# Altium PCB DIOT_Sampler 20spacin.PCBDOC (part 2 of 8)
Units mm, origin at the board's own origin, x right, y up, seen from the top; angles counter-clockwise.
Board outline 222.37 x 100 mm, 4 copper layers (Top, GP1(GND), L3, Bot), stack 1.648 mm thick; 680 components, 424 nets, 2212 pads, 808 vias.
Unrouted connection lines stored in the file: 327.
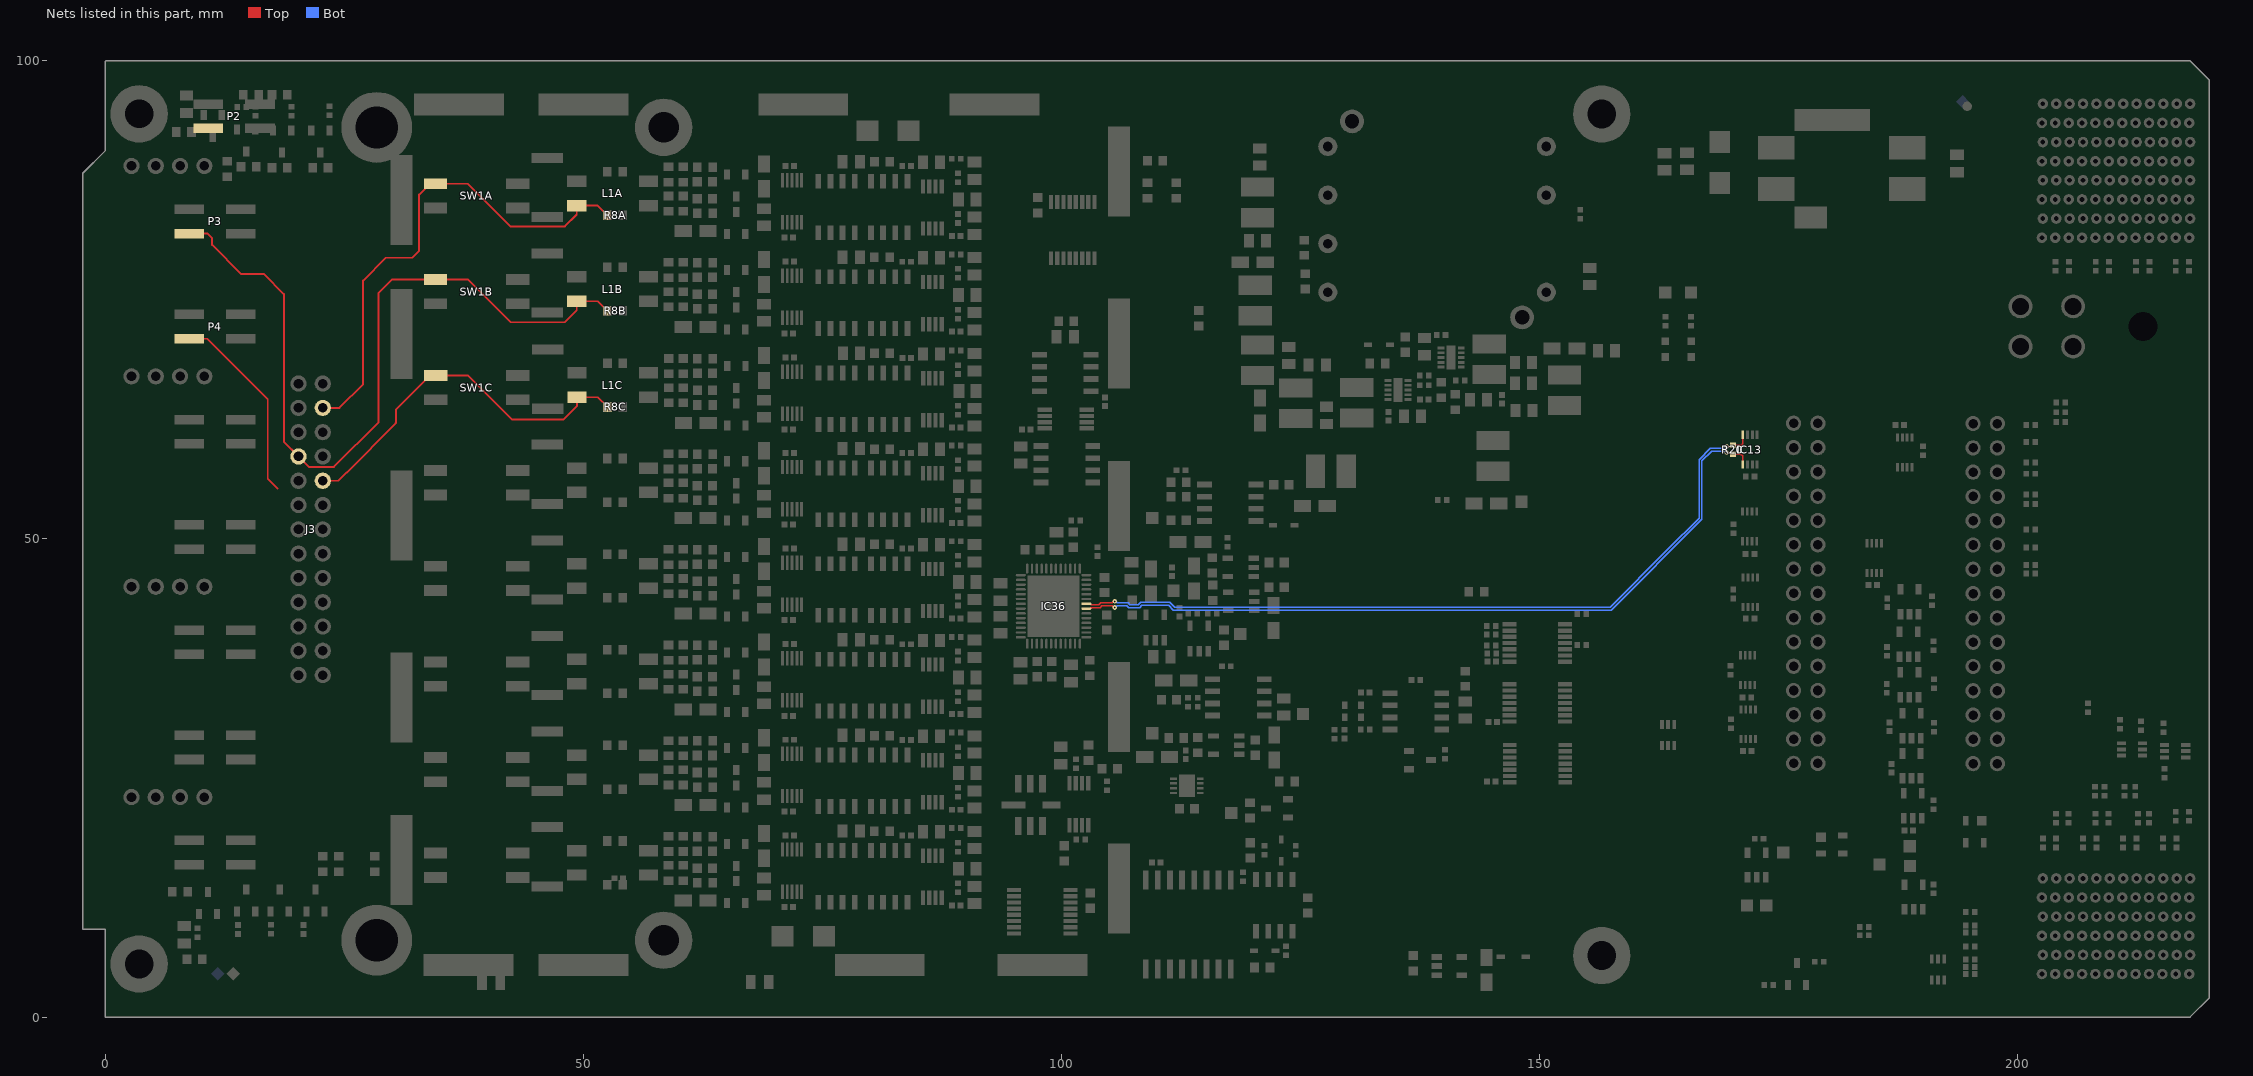
[diagram p4: the nets of this part, all layers, seen from the top]

## Components (designator, comment, footprint, x,y, rotation, side; value= is the part's Value field where it differs from the comment) (continued)
R109 "10k" RESC1005X40N 154.438,42.135 r180 top
R110 "0" RESC1005X40N 131.77,30.072 r0 top
R111 "0" RESC1005X40N 140.109,27.492 r90 top
R112 "2k7" RESC1608X55N 142.24,35.372 r270 top
R113 "10k" RESC1005X40N 128.584,29.592 r90 top
R114 "1k6" RESC1005X40N 154.413,114.25 r180 top
R115 "10k" RESC1005X40N 154.376,115.45 r180 top
R116 "0" RESC1005X40N 166.47,111.275 r0 top
R117 "0" RESC1005X40N 157.87,110.65 r0 top
R118 "10k" RESC1005X40N 163.16,72.751 r90 top
R119 "1k" RESC1005X40N 165.86,72.751 r90 top
R120 "0" RESC1005X40N 183.98,9.426 r180 top
R121 "0" RESC1005X40N 183.98,8.551 r180 top
R122 "0" RESC1005X40N 201.39,61.914 r180 top
R123 "0" RESC1005X40N 201.39,58.007 r180 top
R124 "0" RESC1005X40N 201.39,54.663 r180 top
R125 "0" RESC1005X40N 201.39,49.118 r180 top
R126 "0" RESC1005X40N 201.39,47.267 r180 top
R127 "0" RESC1005X40N 205.3,20.8 r90 top
R128 "0" RESC1005X40N 209.5,20.8 r90 top
R129 "0" RESC1005X40N 212.439,18.2 r90 top
R130 "0" RESC1005X40N 216.6,18.2 r90 top
R131 "0" RESC1005X40N 204,18.2 r90 top
R132 "0" RESC1005X40N 208.239,18.2 r90 top
R133 "0" RESC1005X40N 213.77,78.51 r270 top
R134 "0" RESC1005X40N 217.939,78.51 r270 top
R135 "0" RESC1005X40N 205.37,78.51 r270 top
R136 "0" RESC1005X40N 209.57,78.51 r270 top
R137 "0" RESC1005X40N 209.089,23.6 r90 top
R138 "0" RESC1005X40N 201.39,60.145 r180 top
R139 "0" RESC1005X40N 201.39,56.814 r180 top
R140 "0" RESC1005X40N 201.39,53.666 r180 top
R141 "0" RESC1005X40N 201.39,50.98 r180 top
R142 "0" RESC1005X40N 201.39,46.374 r180 top
R143 "0" RESC1005X40N 204,20.8 r90 top
R144 "0" RESC1005X40N 208.139,20.8 r90 top
R145 "0" RESC1005X40N 211.039,18.2 r90 top
R146 "0" RESC1005X40N 215.2,18.2 r90 top
R147 "0" RESC1005X40N 202.639,18.2 r90 top
R148 "0" RESC1005X40N 206.839,18.2 r90 top
R149 "0" RESC1005X40N 212.37,78.51 r270 top
R150 "0" RESC1005X40N 216.539,78.51 r270 top
R151 "0" RESC1005X40N 203.97,78.51 r270 top
R152 "0" RESC1005X40N 208.17,78.51 r270 top
R153 "0" RESC1005X40N 208.1,23.6 r90 top
R154 "0" RESC1005X40N 204.508,62.224 r180 top
R155 "0" RESC1005X40N 204.508,63.246 r180 top
R156 "0" RESC1005X40N 204.508,64.268 r180 top
R157 "0" RESC1005X40N 139.851,54.055 r0 top
RN1A "10k 5K 5K 10K" SOIC127P600X175-8N 76.493,84.707 r90 top (schematic designator RN1)
RN1B "10k 5K 5K 10K" SOIC127P600X175-8N 76.493,74.707 r90 top (schematic designator RN1)
RN1C "10k 5K 5K 10K" SOIC127P600X175-8N 76.506,64.663 r90 top (schematic designator RN1)
RN1D "10k 5K 5K 10K" SOIC127P600X175-8N 76.493,54.707 r90 top (schematic designator RN1)
RN1E "10k 5K 5K 10K" SOIC127P600X175-8N 76.493,44.707 r90 top (schematic designator RN1)
RN1F "10k 5K 5K 10K" SOIC127P600X175-8N 76.493,34.707 r90 top (schematic designator RN1)
RN1G "10k 5K 5K 10K" SOIC127P600X175-8N 76.493,24.707 r90 top (schematic designator RN1)
RN1H "10k 5K 5K 10K" SOIC127P600X175-8N 76.493,14.707 r90 top (schematic designator RN1)
RN2A "10k 5K 5K 10K" SOIC127P600X175-8N 81.999,84.705 r270 top (schematic designator RN2)
RN2B "10k 5K 5K 10K" SOIC127P600X175-8N 81.999,74.705 r270 top (schematic designator RN2)
RN2C "10k 5K 5K 10K" SOIC127P600X175-8N 82.012,64.662 r270 top (schematic designator RN2)
RN2D "10k 5K 5K 10K" SOIC127P600X175-8N 81.999,54.705 r270 top (schematic designator RN2)
RN2E "10k 5K 5K 10K" SOIC127P600X175-8N 81.999,44.705 r270 top (schematic designator RN2)
RN2F "10k 5K 5K 10K" SOIC127P600X175-8N 81.999,34.705 r270 top (schematic designator RN2)
RN2G "10k 5K 5K 10K" SOIC127P600X175-8N 81.999,24.705 r270 top (schematic designator RN2)
RN2H "10k 5K 5K 10K" SOIC127P600X175-8N 81.999,14.705 r270 top (schematic designator RN2)
RN3 "10k 5K 5K 10K" SOIC127P600X175-8N 100.414,67.355 r180 top
RN4 "10k 5K 5K 10K" SOIC127P600X175-8N 100.589,57.805 r180 top
SW1A "Switch" SW_CTS_204-121ST 38.856,85.87 r270 top (schematic designator SW1)
SW1B "Switch" SW_CTS_204-121ST 38.856,75.87 r270 top (schematic designator SW1)
SW1C "Switch" SW_CTS_204-121ST 38.869,65.826 r270 top (schematic designator SW1)
SW1D "Switch" SW_CTS_204-121ST 38.856,55.87 r270 top (schematic designator SW1)
SW1E "Switch" SW_CTS_204-121ST 38.856,45.87 r270 top (schematic designator SW1)
SW1F "Switch" SW_CTS_204-121ST 38.856,35.87 r270 top (schematic designator SW1)
SW1G "Switch" SW_CTS_204-121ST 38.856,25.87 r270 top (schematic designator SW1)
SW1H "Switch" SW_CTS_204-121ST 38.856,15.87 r270 top (schematic designator SW1)
T1 "BSS138LT1G" SOT95P240X110-3N 11.264,93.18 r270 top
T2 "BSS138LT1G" SOT95P240X110-3N 14.764,91.68 r270 top
T3 "BSS138LT1G" SOT95P240X110-3N 18.514,91.58 r270 top
T4 "BSS138LT1G" SOT95P240X110-3N 22.514,91.58 r270 top
T5 "BSS138LT1G" SOT95P240X110-3N 18.264,12.18 r90 top
T6 "BSS138LT1G" SOT95P240X110-3N 22.014,12.18 r90 top
T7 "BSS138LT1G" SOT95P240X110-3N 10.764,11.93 r90 top
T8 "BSS138LT1G" SOT95P240X110-3N 14.764,12.18 r90 top
T9 "BSS138LT1G" SOT95P240X110-3N 122.549,21.817 r180 top
T10 "BSS138LT1G" SOT95P240X110-3N 176.927,4.504 r90 top
T11 "BSS138LT1G" SOT95P240X110-3N 137.484,26.867 r0 top
TP1 "Test Point" TPS127 188.721,17.857 r0 top
TP2 "Test Point" TPS127 188.747,15.799 r0 top
TP3 "Test Point" TPS127 173.714,11.648 r0 top
TP4 "Test Point" TPS127 171.714,11.648 r0 top
TP5 "Test Point" TPS127 175.489,17.223 r0 top
TP6 "Test Point" TPS127 185.552,15.962 r0 top
TP7 "Test Point" TPS127 109.514,52.18 r0 top
TP8 "Test Point" TPS127 111.744,44.573 r0 top
TP9 "Test Point" TPS127 109.514,29.68 r0 top
TP10 "Test Point" TPS127 118.706,40.07 r90 top
TP11 "Test Point" TPS127 148.128,53.88 r90 top
TP12 "Test Point" TPS127 125.264,31.68 r90 top
TP13 "Test Point" TPS127 117.776,21.342 r90 top
TP14 "P12V0" TPS127 163.16,75.751 r90 top
TP15 "P3V3" TPS127 165.86,75.751 r90 top

## Footprints (in the part's own frame and the unit in brackets; to place one, negate y for a bottom-side part, rotate by r counter-clockwise, add the part's x,y. Pads: shape width x height; smd on the part's side, far side on the other; paste and mask are expansions set on the pad)
3M_N2526-6002RB [mm] "26 Contacts - Straight .100\" x .100\" Low Profile Four-Wall Header"
  round 1.7 hole 1: 1(-15.24,-1.27) 2(-15.24,1.27) 3(-12.7,-1.27) 4(-12.7,1.27) 5(-10.16,-1.27) 6(-10.16,1.27) 7(-7.62,-1.27) 8(-7.62,1.27) 9(-5.08,-1.27) 10(-5.08,1.27) 11(-2.54,-1.27) 12(-2.54,1.27) 13(0,-1.27) 14(0,1.27) 15(2.54,-1.27) 16(2.54,1.27) 17(5.08,-1.27) 18(5.08,1.27) 19(7.62,-1.27) 20(7.62,1.27) 21(10.16,-1.27) 22(10.16,1.27) 23(12.7,-1.27) 24(12.7,1.27) 25(15.24,-1.27) 26(15.24,1.27)
  silkscreen extent -20.17,-4.85 20.17,4.52, body extent -20.17,-4.11 20.17,4.52, height 9.91
3M_N2530-6002RB [mm] "30 Contacts - Straight .100\" x .100\" Low Profile Four-Wall Header"
  round 1.6 hole 1: 1(-17.78,-1.27) 2(-17.78,1.27) 3(-15.24,-1.27) 4(-15.24,1.27) 5(-12.7,-1.27) 6(-12.7,1.27) 7(-10.16,-1.27) 8(-10.16,1.27) 9(-7.62,-1.27) 10(-7.62,1.27) 11(-5.08,-1.27) 12(-5.08,1.27) 13(-2.54,-1.27) 14(-2.54,1.27) 15(0,-1.27) 16(0,1.27) 17(2.54,-1.27) 18(2.54,1.27) 19(5.08,-1.27) 20(5.08,1.27) 21(7.62,-1.27) 22(7.62,1.27) 23(10.16,-1.27) 24(10.16,1.27) 25(12.7,-1.27) 26(12.7,1.27) 27(15.24,-1.27) 28(15.24,1.27) 29(17.78,-1.27) 30(17.78,1.27)
  silkscreen extent -22.71,-4.85 22.71,4.52, body extent -22.71,-4.11 22.71,4.52, height 9.91
9774120360 [mm] "SMT Steel Spacer with internal Thread M3, height 12mm"
  round 7.4 / inner round 0 / far side round 0 hole 4.4 unplated: 1(0,0)
  body extent -3,-3 3,3, height 12
61030421121 [mm] "Pin Header, pitch 2.54 mm, SMD, Vertical, dual row, 4p"
  rect 1x3.1 smd: 1(-1.27,-2.7) 2(-1.27,2.7) 3(1.27,-2.7) 4(1.27,2.7)
  silkscreen extent -2.62,-3.52 2.62,2.62, body extent -2.54,-3.75 2.54,3.75, height 9.62
AMPHENOL_10052825-101LF [mm] "72 Contacts, 2mm Pitch, 6 Columns, 4 Pairs per Column, 4 Walls, Right Angle Header"
  round 1.1 hole 0.5: A1(-5,-7.65) A2(-3,-7.75) A3(-1,-7.65) A4(1,-7.75) A5(3,-7.65) A6(5,-7.75) B1(-5,-6.25) B2(-3,-6.35) B3(-1,-6.25) B4(1,-6.35) B5(3,-6.25) B6(5,-6.35) C1(-5,-4.85) C2(-3,-4.95) C3(-1,-4.85) C4(1,-4.95) C5(3,-4.85) C6(5,-4.95) D1(-5,-3.45) D2(-3,-3.55) D3(-1,-3.45) D4(1,-3.55) D5(3,-3.45) D6(5,-3.55) E1(-5,-2.05) E2(-3,-2.15) E3(-1,-2.05) E4(1,-2.15) E5(3,-2.05) E6(5,-2.15) F1(-5,-0.65) F2(-3,-0.75) F3(-1,-0.65) F4(1,-0.75) F5(3,-0.65) F6(5,-0.75) G1(-5,0.75) G2(-3,0.65) G3(-1,0.75) G4(1,0.65) G5(3,0.75) G6(5,0.65) H1(-5,2.15) H2(-3,2.05) H3(-1,2.15) H4(1,2.05) H5(3,2.15) H6(5,2.05) I1(-5,3.55) I2(-3,3.45) I3(-1,3.55) I4(1,3.45) I5(3,3.55) I6(5,3.45) J1(-5,4.95) J2(-3,4.85) J3(-1,4.95) J4(1,4.85) J5(3,4.95) J6(5,4.85) K1(-5,6.35) K2(-3,6.25) K3(-1,6.35) K4(1,6.25) K5(3,6.35) K6(5,6.25) L1(-5,7.75) L2(-3,7.65) L3(-1,7.75) L4(1,7.65) L5(3,7.75) L6(5,7.65)
  silkscreen extent -6.95,-21.95 6.95,11.85, body extent -6.95,-21.95 6.95,11.85, height 15.25
AMPHENOL_10052838-101LF [mm] "96 Contacts, 2mm Pitch, 8 Columns, 4 Pairs per Column, 4 Walls, Right Angle Header"
  round 1.1 hole 0.5: A1(-7,-7.65) A2(-5,-7.75) A3(-3,-7.65) A4(-1,-7.75) A5(1,-7.65) A6(3,-7.75) A7(5,-7.65) A8(7,-7.75) B1(-7,-6.25) B2(-5,-6.35) B3(-3,-6.25) B4(-1,-6.35) B5(1,-6.25) B6(3,-6.35) B7(5,-6.25) B8(7,-6.35) C1(-7,-4.85) C2(-5,-4.95) C3(-3,-4.85) C4(-1,-4.95) C5(1,-4.85) C6(3,-4.95) C7(5,-4.85) C8(7,-4.95) D1(-7,-3.45) D2(-5,-3.55) D3(-3,-3.45) D4(-1,-3.55) D5(1,-3.45) D6(3,-3.55) D7(5,-3.45) D8(7,-3.55) E1(-7,-2.05) E2(-5,-2.15) E3(-3,-2.05) E4(-1,-2.15) E5(1,-2.05) E6(3,-2.15) E7(5,-2.05) E8(7,-2.15) F1(-7,-0.65) F2(-5,-0.75) F3(-3,-0.65) F4(-1,-0.75) F5(1,-0.65) F6(3,-0.75) F7(5,-0.65) F8(7,-0.75) G1(-7,0.75) G2(-5,0.65) G3(-3,0.75) G4(-1,0.65) G5(1,0.75) G6(3,0.65) G7(5,0.75) G8(7,0.65) H1(-7,2.15) H2(-5,2.05) H3(-3,2.15) H4(-1,2.05) H5(1,2.15) H6(3,2.05) H7(5,2.15) H8(7,2.05) I1(-7,3.55) I2(-5,3.45) I3(-3,3.55) I4(-1,3.45) I5(1,3.55) I6(3,3.45) I7(5,3.55) I8(7,3.45) J1(-7,4.95) J2(-5,4.85) J3(-3,4.95) J4(-1,4.85) J5(1,4.95) J6(3,4.85) J7(5,4.95) J8(7,4.85) K1(-7,6.35) K2(-5,6.25) K3(-3,6.35) K4(-1,6.25) K5(1,6.35) K6(3,6.25) K7(5,6.35) K8(7,6.25) L1(-7,7.75) L2(-5,7.65) L3(-3,7.75) L4(-1,7.65) L5(1,7.75) L6(3,7.65) L7(5,7.75) L8(7,7.65)
  silkscreen extent -8.95,-21.95 8.95,11.85, body extent -8.95,-21.95 8.95,11.85, height 15.25
CAPC1005X55N [mm] "Chip Capacitor, Body 1.0x0.55mm, IPC Medium Density"
  rect 0.62x0.62 smd: 1(-0.45,0) 2(0.45,0)
  body extent -0.52,-0.27 0.53,0.28, height 0.55
CAPC1608X87N [mm] "Chip Capacitor, Body 1.6x0.8mm IPC Medium Density"
  rect 0.95x1 smd: 1(-0.8,0) 2(0.8,0)
  body extent -0.87,-0.47 0.88,0.48, height 0.87
CAPC2012X90N [mm] "Chip Capacitor, Body 2.0x1.25mm, IPC Medium Density"
  rect 1.1x1.45 smd: 1(-0.9,0) 2(0.9,0)
  silkscreen extent 0,-0.58 0,0.58, body extent -1.05,-0.67 1.05,0.68, height 0.9
CAPC2012X95N [mm] "Chip Capacitor, Body 2.0x1.25mm, IPC Medium Density"
  rect 1.1x1.45 smd: 1(-0.9,0) 2(0.9,0)
  silkscreen extent 0,-0.58 0,0.58, body extent -1.05,-0.67 1.05,0.68, height 0.95
CAPC2012X135N [mm] "Chip Capacitor, Body 2.0x1.25mm, IPC Medium Density"
  rect 1.05x1.4 smd: 1(-0.9,0) 2(0.9,0)
  silkscreen extent 0,-0.58 0,0.58, body extent -1.05,-0.67 1.05,0.68, height 1.25
CAPC2013X100N [mm] "Capacitor, Non-Polarized, Chip; 2.00mm L X 1.25mm W X 0.9mm H, IPC Medium Density"
  rect 1.15x1.45 smd: 1(-0.9,0) 2(0.9,0)
  silkscreen extent 0,-0.63 0,0.63, body extent -1.1,-0.72 1.1,0.73, height 1
CAPMP3216X180N [mm] "Capacitor, Polarized, Molded  Body 3.2x1.6mm, IPC Medium Density"
  rect 1.8x1.25 smd: 1(-1.3,0) 2(1.3,0)
  silkscreen extent -2.4,-0.7 0,1.2, body extent -1.7,-0.9 1.7,0.9, height 1.6
CC6-1212DF-E [mm]
  round 2 hole 1: 1(-2.54,-2.63) 2(-2.54,-12.79) 3(-2.54,-17.87) 4(20.32,-17.87) 5(20.32,-12.79) 6(20.32,-7.71) 7(20.32,-2.63)
  round 2.5 hole 1.5: 8(0,0) 9(17.78,-20.5)
  silkscreen extent -4.06,-20.83 20.44,0.25, body extent -2.72,-20.81 20.44,0.29, height 8.4
CLIP_HOLLAND-SHIELDING_LC [mm] "Surface Mount Clip for PCB Screening Covers"
  rect 9.4x2.3 smd: 1(0,0)
  silkscreen extent -4.7,-1.5 4.7,1.5, body extent -4.4,-1.15 4.4,1.15, height 3.5
DIOM5336X265N [mm] "DO-214-AA/SMB Diode, Molded Body; 5.34mm L X 3.625mm W X 2.65mm H, IPC Medium Density"
  rect 2.3x2.15 smd: 1(-2.15,0) 2(2.15,0)
  silkscreen extent -3.92,-1.8 2.65,1.8, body extent -2.7,-1.95 2.7,1.95, height 2.4
FIDUCIAL_TOP_C100-200 [mm] "Round Fiducial Target, Top Layer, 1.0mm, Top Solder 2.0mm, Keepout =2.0mm"
  round 1 smd paste-0.51 mask+0.5: FTG2(0,0)
  Top keep-out circle w0.1: c0,0 r1
FIDUCIAL_TOP_S100-200 [mm] "Square Fiducial Target, Top Layer, 1.0mm, Top Solder 2.0mm, Keepout =2.0mm"
  rect 1x1 smd rot 45 paste-0.51 mask+0.5: 1(0,0)
  Top keep-out region: 1.414,0 0,-1.414 -1.414,0 0,1.414
FIL_MURATA_BNX02 [mm] "Block Type EMIFIL LC Combined Type, BNX02* Series"
  rect 3.8x2.5 smd: 1(-6.85,2.1) 2(6.85,2.1) 3(-6.85,-2.2) 4(6.85,-2.2)
  rect 7.9x2.3 smd: 4(1,-5.1)
  rect 3.4x2.3 smd: 4(3.25,5.1)
  silkscreen extent -5.95,-4.45 7.77,5.05, body extent -6.05,-4.55 6.05,4.55, height 3.1
IND_MURATA-PS_8400 [mm] "Miniature Surface Mount Power Inductors, 4.5mm L X 3.3mm W X 2.9mm H, MURATA 8400 Serie"
  rect 2x3.5 smd: 1(-1.6,0) 2(1.6,0)
  silkscreen extent -0.3,-1.8 0.3,1.8, body extent -2.4,-1.8 2.4,1.8, height 2.9
IND_WURTH_WE-SL2 [mm] "Common Mode SMD Line Filter WE-SL2"
  rect 2x1.2 smd: 1(-3.75,1.27) 2(-3.75,-1.27) 3(3.75,-1.27) 4(3.75,1.27)
  silkscreen extent -4.75,-3.15 4.75,3.15, body extent -4.75,-3.15 4.75,3.15, height 5.3
LCCS127P500X500X145-8N [mm] "LCC, 8-Pins, Body 5,00x5,00mmx1,45mm, Pitch 1,27mm, IPC Medium Density"
  rect 1.85x0.7 smd: 1(-2.2,1.27) 2(-2.2,0) 3(-2.2,-1.27) 5(2.2,-1.27) 6(2.2,0) 7(2.2,1.27)
  rect 0.7x1.85 smd: 4(0,-2.2)
  rect 0.7x2.5 smd: 8(0,1.75)
  silkscreen extent -3.8,-2.6 2.6,2.6, body extent -2.63,-2.63 2.63,2.63, height 1.55
LED_DIALIGHT_571-0122F [mm] "2x 2mm LED (Top: Green, Bot: Green) PCB Edge Mounting (Without positioning pins) DIALIGHT 571 Serie"
  round 1.7 hole 1: 1(0,0) 2(2.54,0) 3(5.08,0) 4(7.62,0)
  silkscreen extent -6.55,-1.24 8.89,1.24, body extent -6.55,-1.24 8.89,1.24, height 8.61
LED_KINGBRIGHT_KPH-1608CGCK [mm] "SMT Green LED, Case 0603, Body L 1.6 x W 0.8mm H 0.65mm"
  rect 0.8x0.8 smd: 1(-0.825,0) 2(0.825,0)
  silkscreen extent -1.83,-0.4 0.08,0.4, body extent -0.8,-0.4 0.8,0.4, height 0.65
LT-DD-8_V [mm] "SON, 8-Leads, Body 3x3mm, Pitch 0.5mm, Thermal Pad 1.65x2.38 mm, IPC Low Density"
  rect 0.7x0.25 smd mask+0.102: 1(-1.4,0.75) 2(-1.4,0.25) 3(-1.4,-0.25) 4(-1.4,-0.75) 5(1.4,-0.75) 6(1.4,-0.25) 7(1.4,0.25) 8(1.4,0.75)
  rect 1.65x2.38 smd mask+0.102: 9(0,0)
  silkscreen extent -2,-1.55 1.55,1.6, body extent -1.5,-1.5 1.5,1.5, height 0.8
MOLEX_39-30-0040 [mm] "4.20mm (.165\") Pitch Mini-Fit Jr. Header, Dual Row, Right Angle with Snap-in Plastic Peg PCB Lock, 4 Circuits"
  round 2.5 hole 1.8: 1(-2.1,2.75) 2(2.1,2.75) 3(-2.1,-2.75) 4(2.1,-2.75)
  round 1 hole 3 unplated mask+1: 5(0,10.05)
  silkscreen extent -5.2,-1.24 4.8,16.65, body extent -5.2,-3.28 4.8,16.65, height 11.4
MTG300_600#1 [mm] "Plated Through Hole: Hole Dia.=3.0mm Pad Dia.=6.0mm"
  round 6 hole 3: 1(0,0)
MTG300_600#2 [mm] "Plated Through Hole: Hole Dia.=3.0mm Pad Dia.=6.0mm"
  round 6 hole 3: 1(-0.568,0)
QFN50P700X800X80_HS-53M [mm] "QFN, 52-Leads, Body 7.00x8.00mm, Pitch 0.50mm, Thermal Pad 5.41x6.40mm, IPC Low Density"
  oval 1.05x0.25 smd: 1(-3.425,3.25) 2(-3.425,2.75) 3(-3.425,2.25) 4(-3.425,1.75) 5(-3.425,1.25) 6(-3.425,0.75) 7(-3.425,0.25) 8(-3.425,-0.25) 9(-3.425,-0.75) 10(-3.425,-1.25) 11(-3.425,-1.75) 12(-3.425,-2.25) 13(-3.425,-2.75) 14(-3.425,-3.25) 27(3.425,-3.25) 28(3.425,-2.75) 29(3.425,-2.25) 30(3.425,-1.75) 31(3.425,-1.25) 32(3.425,-0.75) 33(3.425,-0.25) 34(3.425,0.25) 35(3.425,0.75) 36(3.425,1.25) 37(3.425,1.75) 38(3.425,2.25) 39(3.425,2.75) 40(3.425,3.25)
  oval 0.25x1.05 smd: 15(-2.75,-3.925) 16(-2.25,-3.925) 17(-1.75,-3.925) 18(-1.25,-3.925) 19(-0.75,-3.925) 20(-0.25,-3.925) 21(0.25,-3.925) 22(0.75,-3.925) 23(1.25,-3.925) 24(1.75,-3.925) 25(2.25,-3.925) 26(2.75,-3.925) 41(2.75,3.925) 42(2.25,3.925) 43(1.75,3.925) 44(1.25,3.925) 45(0.75,3.925) 46(0.25,3.925) 47(-0.25,3.925) 48(-0.75,3.925) 49(-1.25,3.925) 50(-1.75,3.925) 51(-2.25,3.925) 52(-2.75,3.925)
  rect 5.41x6.4 smd: 53(0,0)
  silkscreen extent -4.47,-4.2 3.7,4.2, body extent -3.55,-4.05 3.55,4.05, height 0.8
RESC1005X40N [mm] "Chip Resistor, EIA 0402, Metric 1005, Body 1.0x0.5mm, IPC Medium Density"
  rect 0.58x0.62 smd: 1(-0.47,0) 2(0.47,0)
  body extent -0.52,-0.27 0.53,0.28, height 0.4
RESC1608X55N [mm] "Chip Resistor, EIA 0603, Metric 1608, Body 1.6x0.8mm, IPC Medium Density"
  rect 0.9x1 smd: 1(-0.8,0) 2(0.8,0)
  body extent -0.87,-0.47 0.88,0.48, height 0.55
RESC2113X55N [mm] "Chip Resistor, EIA 0805, Metric 2113, Body 2.05x1.3mm, IPC Medium Density"
  rect 1x1.45 smd: 1(-0.95,0) 2(0.95,0)
  silkscreen extent 0,-0.55 0,0.55, body extent -1,-0.62 1,0.63, height 0.55
RESC6331X70N [mm] "Chip Resistor, EIA 2512, Metric 6331, 2-Leads, Body 6.3x3.1mm, IPC Medium Density"
  rect 1.05x3.3 smd: 1(-3.1,0) 2(3.1,0)
  silkscreen extent -2.2,-1.65 2.2,1.65, body extent -3.25,-1.65 3.25,1.65, height 0.7
SOD2512X110N [mm] "Small Outline Diode (SOD-323), 1.70mm W X 1.25mm L X 1.10mm H body,  IPC Medium Density"
  rect 0.9x0.5 smd: 1(-1.3,0) 2(1.3,0)
  silkscreen extent -1.63,-0.65 0.85,0.87, body extent -1.35,-0.67 1.35,0.68, height 1.1
SOD-523F [mm] "Small Outline Diode Flat Lead (SOD-523F), Body; 1.80mm L X 1mm W X 0.85mm H"
  rect 0.6x0.8 smd: 1(-0.85,0) 2(0.85,0)
  silkscreen extent -1.87,-0.5 0.2,0.52, body extent -0.91,-0.5 0.89,0.5, height 0.85
SODFL2512X100N [mm] "SODFL Diode; 1.70mm W X 1.25mm L X 1.00mm H body, IPC Medium Density"
  rect 0.84x0.46 smd: 1(-1.14,0) 2(1.14,0)
  silkscreen extent -1.47,-0.65 0.85,0.86, body extent -1.35,-0.65 1.35,0.65, height 1
SOIC127P600X175-8N [mm] "SOIC 8, Pitch 1.27mm - Body 4x5mm, IPC Medium Density"
  rect 1.55x0.6 smd: 1(-2.7,1.905) 2(-2.7,0.635) 3(-2.7,-0.635) 4(-2.7,-1.905) 5(2.7,-1.905) 6(2.7,-0.635) 7(2.7,0.635) 8(2.7,1.905)
  silkscreen extent -2.52,-2.5 1.55,2.88, body extent -3.1,-2.5 3.1,2.5, height 1.75
SOIC127P1030X265-16N [mm] "SOIC 16, Pitch 1.27mm - Body 7.5x10.3mm, IPC Medium Density"
  rect 2x0.6 smd: 1(-4.65,4.445) 2(-4.65,3.175) 3(-4.65,1.905) 4(-4.65,0.635) 5(-4.65,-0.635) 6(-4.65,-1.905) 7(-4.65,-3.175) 8(-4.65,-4.445) 9(4.65,-4.445) 10(4.65,-3.175) 11(4.65,-1.905) 12(4.65,-0.635) 13(4.65,0.635) 14(4.65,1.905) 15(4.65,3.175) 16(4.65,4.445)
  silkscreen extent -5.52,-5.15 3.33,5.37, body extent -5.18,-5.25 5.18,5.25, height 1.68
SON50P200X300X80-11N-R94X250 [mm] "SON, 10-Leads, Body 2x3mm, Pitch 0.5mm, Thermal Pad 0.94x2.5mm, IPC Medium Density"
  rect 0.7x0.3 smd: 1(-1.05,1) 2(-1.05,0.5) 3(-1.05,0) 4(-1.05,-0.5) 5(-1.05,-1) 6(1.05,-1) 7(1.05,-0.5) 8(1.05,0) 9(1.05,0.5) 10(1.05,1)
  rect 0.94x2.5 smd: 11(0,0)
  silkscreen extent -1.5,-1.55 1.05,1.6, body extent -1.05,-1.55 1.05,1.55, height 0.8
SOP50P310X90-8N [mm] "SOP, 0.50mm pitch; 8 pin, 2.30mm W X 2.00mm L X 0.90mm H body, PC Medium Density"
  rect 0.85x0.3 smd: 1(-1.55,0.75) 2(-1.55,0.25) 3(-1.55,-0.25) 4(-1.55,-0.75) 5(1.55,-0.75) 6(1.55,-0.25) 7(1.55,0.25) 8(1.55,0.75)
  silkscreen extent -1.82,-1 0.8,1.53, body extent -1.62,-1 1.62,1, height 0.9
SOP50P490X110-10N [mm] "MSOP, 10-Leads, Body 3.1x3.1mm (max), Pitch 0.50mm, IPC Medium Density"
  rect 1.5x0.3 smd: 1(-2.2,1) 2(-2.2,0.5) 3(-2.2,0) 4(-2.2,-0.5) 5(-2.2,-1) 6(2.2,-1) 7(2.2,-0.5) 8(2.2,0) 9(2.2,0.5) 10(2.2,1)
  silkscreen extent -2.82,-1.5 1.13,1.77, body extent -2.45,-1.55 2.45,1.55, height 1.1
SOP65P490X109-8N [mm] "SOP, 0.65mm pitch; 8 pin,3.00mm W X 3.00mm L X 1.09mm H bodyI, PC Medium Density"
  rect 1.5x0.45 smd: 1(-2.2,0.975) 2(-2.2,0.325) 3(-2.2,-0.325) 4(-2.2,-0.975) 5(2.2,-0.975) 6(2.2,-0.325) 7(2.2,0.325) 8(2.2,0.975)
  silkscreen extent -2.83,-1.5 1.12,1.82, body extent -2.45,-1.55 2.45,1.55, height 1.09
SOP65P490X110-8N [mm] "SOP, 0.65mm pitch; 8 pin, 3.00mm W X 3.00mm L X 1.10mm H body, IPC Medium Density"
  rect 1.5x0.45 smd: 1(-2.2,0.975) 2(-2.2,0.325) 3(-2.2,-0.325) 4(-2.2,-0.975) 5(2.2,-0.975) 6(2.2,-0.325) 7(2.2,0.325) 8(2.2,0.975)
  silkscreen extent -2.82,-1.5 1.12,1.82, body extent -2.45,-1.55 2.45,1.55, height 1.1
SOP65P640X110-14N [mm] "SOP, 14-Leads, Body 4.4x5mm (max), Pitch 0.65mm, IPC Medium Density"
  rect 1.45x0.45 smd: 1(-2.9,1.95) 2(-2.9,1.3) 3(-2.9,0.65) 4(-2.9,0) 5(-2.9,-0.65) 6(-2.9,-1.3) 7(-2.9,-1.95) 8(2.9,-1.95) 9(2.9,-1.3) 10(2.9,-0.65) 11(2.9,0) 12(2.9,0.65) 13(2.9,1.3) 14(2.9,1.95)
  silkscreen extent -3.48,-2.5 1.85,2.82, body extent -3.12,-2.55 3.12,2.55, height 1.1
SOP65P640X120-16N [mm] "SOP, 0.65mm pitch; 16 pin, 4.40mm W X 5.00mm L X 1.20mm H body IPC Medium Density"
  rect 1.45x0.45 smd: 1(-2.95,2.275) 2(-2.95,1.625) 3(-2.95,0.975) 4(-2.95,0.325) 5(-2.95,-0.325) 6(-2.95,-0.975) 7(-2.95,-1.625) 8(-2.95,-2.275) 9(2.95,-2.275) 10(2.95,-1.625) 11(2.95,-0.975) 12(2.95,-0.325) 13(2.95,0.325) 14(2.95,0.975) 15(2.95,1.625) 16(2.95,2.275)
  silkscreen extent -3.07,-2.55 1.85,3.17, body extent -3.12,-2.55 3.12,2.55, height 1.2
SOT65P210X110-6N [mm] "SOT363, SC70-6, SOT, 0.65mm Pitch, 6 Pin, 1.25mm W X 2.00mm L X 1.10mm H, IPC Medium Density"
  rect 0.95x0.4 smd: 1(-1.1,0.65) 2(-1.1,0) 3(-1.1,-0.65) 4(1.1,-0.65) 5(1.1,0) 6(1.1,0.65)
  silkscreen extent -1.43,-1 0.3,1.47, body extent -1.2,-1.1 1.2,1.1, height 1.1
SOT95P240X110-3N [mm] "SOT23 3-Leads, Pitch 0.95mm, Body 1.3x2.9mm, IPC Medium Density"
  rect 1.05x0.65 smd: 1(-1.15,0.95) 2(-1.15,-0.95) 3(1.15,0)
  silkscreen extent -1.52,-1.45 0.3,1.92, body extent -1.25,-1.5 1.25,1.5, height 1.1
SOT95P280X100-5N [mm] "SOT23, 0.95mm pitch; 5 pin, 1.625mm W X 2.9mm L, IPC Medium Density"
  rect 1.1x0.55 smd: 1(-1.35,0.95) 2(-1.35,0) 3(-1.35,-0.95) 4(1.35,-0.95) 5(1.35,0.95)
  silkscreen extent -1.78,-1.45 0.48,1.87, body extent -1.4,-1.5 1.4,1.5, height 1
SOT95P280X145-5N [mm] "SOT, 0.95mm pitch; 5 pin, 1.60mm W X 2.90mm L X 1.45mm H body, IPC Medium Density"
  rect 1.1x0.6 smd: 1(-1.3,0.95) 2(-1.3,0) 3(-1.3,-0.95) 4(1.3,-0.95) 5(1.3,0.95)
  silkscreen extent -1.72,-1.45 0.43,1.87, body extent -1.4,-1.5 1.4,1.5, height 1.45
SOT190P230X110-4N [mm] "SOT143, SOT, 1.90mm Pitch; 4 Pin, 1.30mm W X 2.90mm L X 1.10mm H body, IPC Medium Density"
  rect 1x1 smd: 1(-1.15,0.75)
  rect 1x0.6 smd: 2(-1.15,-0.95) 3(1.15,-0.95) 4(1.15,0.95)
  silkscreen extent -1.52,-1.45 0.33,1.88, body extent -1.25,-1.5 1.25,1.5, height 1.1
SW_CTS_204-121ST [mm] "Body 7.26 x 9.78mm SPST DIP Switch, 204 Series"
  rect 1.13x2.44 smd: 1(-1.27,-4.3) 2(1.27,-4.3) 3(1.27,4.3) 4(-1.27,4.3)
  silkscreen extent -3.63,-4.89 3.63,4.89, body extent -3.63,-5.2 3.63,5.2, height 10.36
TPS127 [mm] "1.27 x  1.27mm SMD Test Point Area"
  rect 1.27x1.27 smd paste-1.27: 1(0,0)
  silkscreen extent -0.94,-0.94 0.94,0.94

## Part data
C1A C1B C1C C1D C1E C1F C1G C1H C5A C5B C5C C5D C5E C5F C5G C5H: library part CC0603_18PF_50V_5%_NP0, "Non-polarised capacitor", Case=0603, Manufacturer=GENERIC, Manufacturer1 ComponentHeight=0.87mm, Manufacturer1 Example=PHYCOMP, Manufacturer1 Part Number=223886715189, Tolerance=±5%, Voltage=50V, Author="CERN DEM JLC", Component Type=Standard, CreateDate=03.12.2007, HelpURL=\\cern.ch\dfs\Applications\Altium\Datasheets\CC0603_NP0_PHYCOMP.pdf, LatestRevisionDate=03.12.2007, Manufacturer Part Number=CC0603_18PF_50V_5%_NP0, Mounted=Yes, Part Description="SMD Multilayer Chip Ceramic Capacitor", Part Number=CC0603_18PF_50V_5%_NP0, Pin Count=2, Sense=No, SMD=Yes, Socket=No, Status=Preferred, TC=C0G/NP0
C2A C2B C2C C2D C2E C2F C2G C2H: library part CC0805_82PF_100V_1%_NP0_AVX_08051A820FAT2A, "Non-polarised capacitor", Case=0805, Manufacturer=AVX, Manufacturer Part Number=08051A820FAT2A, Tolerance=±1%, Voltage=100V, Author="CERN DEM WB", ComponentHeight=0.9mm, Component Type=Standard, CreateDate=26.07.2016, HelpURL=\\cern.ch\dfs\Applications\Altium\Datasheets\CC0805_C0G_AVX.pdf, LatestRevisionDate=26.07.2016, Mounted=Yes, Part Description="SMD Multilayer Chip Ceramic Capacitor", Part Number=CC0805_82PF_100V_1%_NP0_AVX_08051A820FAT2A, Pin Count=2, Sense=No, SMD=Yes, Socket=No, Status="Not Recommended", TC=NP0
C3A C3B C3C C3D C3E C3F C3G C3H C12A C12B C12C C12D C12E C12F C12G C12H C103 C106: library part CC0805_47NF_25V_5%_C0G, "Non-polarised capacitor", Case=0805, Manufacturer=GENERIC, Manufacturer1 ComponentHeight=1.4mm, Manufacturer1 Example=KEMET, Manufacturer1 Part Number=C0805C473J3GACTU, Tolerance=±5%, Voltage=25V, Author="CERN DEM JLC", Component Type=Standard, CreateDate=18.01.2011, HelpURL="\\cern.ch\dfs\Applications\Altium\Datasheets\CC0805_C0G_KEMET_(Commercial Grade).pdf", LatestRevisionDate=18.01.2011, Manufacturer Part Number=CC0805_47NF_25V_5%_C0G, Mounted=Yes, Part Description="SMD Multilayer Chip Ceramic Capacitor", Part Number=CC0805_47NF_25V_5%_C0G, Pin Count=2, Sense=No, SMD=Yes, Socket=No, Status=None, TC=C0G/NP0
C4A C4B C4C C4D C4E C4F C4G C4H C6A C6B C6C C6D C6E C6F C6G C6H C7A C7B C7C C7D C7E C7F C7G C7H: library part CC0805_2.2NF_25V_1%_C0G, "Non-polarised capacitor", Case=0805, Manufacturer=GENERIC, Manufacturer1 ComponentHeight=0.88mm, Manufacturer1 Example=KEMET, Manufacturer1 Part Number=C0805C222F3GACTU, Tolerance=±1%, Voltage=25V, Author="CERN DEM JLC", Component Type=Standard, CreateDate=11.03.2015, HelpURL="\\cern.ch\dfs\Applications\Altium\Datasheets\CC0805_C0G_KEMET_(Commercial Grade).pdf", LatestRevisionDate=11.03.2015, Manufacturer Part Number=CC0805_2.2NF_25V_1%_C0G, Mounted=Yes, Part Description="SMD Multilayer Chip Ceramic Capacitor", Part Number=CC0805_2.2NF_25V_1%_C0G, Pin Count=2, Sense=No, SMD=Yes, Socket=No, Status=None, TC=C0G/NP0
C8A C8B C8C C8D C8E C8F C8G C8H C11A C11B C11C C11D C11E C11F C11G C11H C38 C44 C47 C50 C52 C60 C62 C63 C67 C77 C80 C84: library part CTE3216-18_10UF_16V_20%_AVX_TCJ, "Polarised capacitor", Case=A, Manufacturer=AVX, Manufacturer Part Number=TCJA106M016R0200, Tolerance=±20%, Voltage=16V, Author="CERN DEM JLC", ComponentHeight=1.8mm, Component Type=Standard, CreateDate=29.03.2012, HelpURL=\\cern.ch\dfs\Applications\Altium\Datasheets\CTE_AVX_TCJ.pdf, LatestRevisionDate=29.03.2012, Mounted=Yes, Part Description="ESR 0R200 Tantalum Solid Electrolytic Chip Capacitor with Conductive Polymer Electrode", Part Number=CTE3216-18_10UF_16V_20%_AVX_TCJ, Pin Count=2, Sense=No, SMD=Yes, Socket=No, Status=Preferred
C9A C9B C9C C9D C9E C9F C9G C9H C10A C10B C10C C10D C10E C10F C10G C10H C13A C13B C13C C13D C13E C13F C13G C13H C14A C14B C14C C14D C14E C14F C14G C14H: library part CC0402_100NF_16V_10%_X7R, "Non-polarised capacitor", Case=0402, Manufacturer=GENERIC, Manufacturer1 ComponentHeight=0.55mm, Manufacturer1 Example=MURATA, Manufacturer1 Part Number=GRM155R71C104KA88D, Tolerance=±10%, Voltage=16V, Author="CERN DEM JLC", Component Type=Standard, CreateDate=2013-12-05, HelpURL=\\cern.ch\dfs\Applications\Altium\Datasheets\CC0402_X7R_MURATA_GRM.pdf, LatestRevisionDate=2007-12-03, Manufacturer Part Number=CC0402_100NF_16V_10%_X7R, Mounted=Yes, Part Description="SMD Multilayer Chip Ceramic Capacitor", Part Number=CC0402_100NF_16V_10%_X7R, Pin Count=2, Sense=No, SMD=Yes, Socket=No, Status="Not Recommended", TC=X7R
C15 C16 C17 C18 C19 C20 C21 C22 C23 C24 C25 C26 C27 C28 C29 C30 C31 C39 C45 C64 C69 C73 C76 C78 C83 C85 C104 C105 C107 C108 C110 C111 C113 C122 C123: library part CC0402_100NF_16V_10%_X5R, "Non-polarised capacitor", Case=0402, Manufacturer=GENERIC, Manufacturer1 ComponentHeight=0.55mm, Manufacturer1 Example=MURATA, Manufacturer1 Part Number=GRM155R61C104KA88D, Tolerance=±10%, Voltage=16V, Author="CERN DEM JLC", Component Type=Standard, CreateDate=10.12.2013, HelpURL=\\cern.ch\dfs\Applications\Altium\Datasheets\CC0402_X5R_MURATA_GRM.pdf, LatestRevisionDate=10.12.2013, Manufacturer Part Number=CC0402_100NF_16V_10%_X5R, Mounted=Yes, Part Description="SMD Multilayer Chip Ceramic Capacitor", Part Number=CC0402_100NF_16V_10%_X5R, Pin Count=2, Sense=No, SMD=Yes, Socket=No, Status=None, TC=X5R
C32 C33 C87 C88 C89 C90 C92 C93: library part CC0603_100NF_50V_10%_X7R, "Non-polarised capacitor", Case=0603, Manufacturer=GENERIC, Manufacturer1 ComponentHeight=0.87mm, Manufacturer1 Example=PHYCOMP, Manufacturer1 Part Number=223858615649, Tolerance=±10%, Voltage=50V, Author="CERN DEM JLC", Component Type=Standard, CreateDate=03.12.2007, HelpURL=\\cern.ch\dfs\Applications\Altium\Datasheets\CC0603_X7R_PHYCOMP.pdf, LatestRevisionDate=03.12.2007, Manufacturer Part Number=CC0603_100NF_50V_10%_X7R, Mounted=Yes, Part Description="SMD Multilayer Chip Ceramic Capacitor", Part Number=CC0603_100NF_50V_10%_X7R, Pin Count=2, Sense=No, SMD=Yes, Socket=No, Status=Preferred, TC=X7R
C34 C36: library part CC0805_NO-VALUE, "Non-polarised capacitor", Case=0805, Manufacturer1 ComponentHeight=1.35mm, Author="CERN DEM JLC", Component Type=Standard, CreateDate=10.12.2008, HelpURL=Undefined, LatestRevisionDate=11.09.2013, Manufacturer=Undefined, Manufacturer Part Number=CC0805_NO-VALUE, Mounted=No, Part Description="Reserved Footprint For 0805(2012) Chip Ceramic Capacitor", Part Number=CC0805_NO-VALUE, Pin Count=2, Sense=No, SMD=Yes, Socket=No, Status=None
C37 C41 C43 C51 C61 C65 C66 C71 C72 C101 C102 C117: library part CC0603_1UF_25V_10%_X7R, "Non-polarised capacitor", Case=0603, Manufacturer=GENERIC, Manufacturer1 ComponentHeight=0.9mm, Manufacturer1 Example=MURATA, Manufacturer1 Part Number=GRM188R71E105KA12D, Tolerance=±10%, Voltage=25V, Author="CERN DEM JLC", Component Type=Standard, CreateDate=18.01.2011, HelpURL=\\cern.ch\dfs\Applications\Altium\Datasheets\CC0603_X7R_MURATA.pdf, LatestRevisionDate=18.01.2011, Manufacturer Part Number=CC0603_1UF_25V_10%_X7R, Mounted=Yes, Part Description="SMD Multilayer Chip Ceramic Capacitor", Part Number=CC0603_1UF_25V_10%_X7R, Pin Count=2, Sense=No, SMD=Yes, Socket=No, Status=None, TC=X7R
C40 C42 C46 C75 C82: library part CC0603_10NF_50V_10%_X7R, "Non-polarised capacitor", Case=0603, Manufacturer=GENERIC, Manufacturer1 ComponentHeight=0.87mm, Manufacturer1 Example=PHYCOMP, Manufacturer1 Part Number=223858615636, Tolerance=±10%, Voltage=50V, Author="CERN DEM JLC", Component Type=Standard, CreateDate=03.12.2007, HelpURL=\\cern.ch\dfs\Applications\Altium\Datasheets\CC0603_X7R_PHYCOMP.pdf, LatestRevisionDate=03.12.2007, Manufacturer Part Number=CC0603_10NF_50V_10%_X7R, Mounted=Yes, Part Description="SMD Multilayer Chip Ceramic Capacitor", Part Number=CC0603_10NF_50V_10%_X7R, Pin Count=2, Sense=No, SMD=Yes, Socket=No, Status=Preferred, TC=X7R
C48 C49 C53 C54 C55 C56 C57 C58 C59 C68 C70 C74 C79 C81 C86 C109: library part CC0805_22UF_16V_10%_X5R, "Non-polarised capacitor", Case=0805, Manufacturer=GENERIC, Manufacturer1 ComponentHeight=1.35mm, Manufacturer1 Example=TDK, Manufacturer1 Part Number=C2012X5R1C226KT, Tolerance=±10%, Voltage=16V, Author="CERN DEM JLC", Component Type=Standard, CreateDate=25.10.2012, HelpURL=\\cern.ch\dfs\Applications\Altium\Datasheets\CC0805_X5R_TDK_C.pdf, LatestRevisionDate=25.10.2012, Manufacturer Part Number=CC0805_22UF_16V_10%_X5R, Mounted=Yes, Part Description="SMD Multilayer Chip Ceramic Capacitor", Part Number=CC0805_22UF_16V_10%_X5R, Pin Count=2, Sense=No, SMD=Yes, Socket=No, Status=Preferred, TC=X5R
C91 C94 C95 C96 C97 C98 C99 C114 C115 C116: library part CC0805_10UF_25V_10%_X5R, "Non-polarised capacitor", Case=0805, Manufacturer=GENERIC, Manufacturer1 ComponentHeight=0.95mm, Manufacturer1 Example=MURATA, Manufacturer1 Part Number=GRM219R61E106KA12D, Tolerance=±10%, Voltage=25V, Author="CERN DEM JLC", Component Type=Standard, CreateDate=25.10.2012, HelpURL=\\cern.ch\dfs\Applications\Altium\Datasheets\CC0805_X5R_MURATA_GRM.pdf, LatestRevisionDate=06.09.2016, Manufacturer Part Number=CC0805_10UF_25V_10%_X5R, Mounted=Yes, Part Description="SMD Multilayer Chip Ceramic Capacitor", Part Number=CC0805_10UF_25V_10%_X5R, Pin Count=2, Sense=No, SMD=Yes, Socket=No, Status=Preferred, TC=X5R
C100: library part CC0603_2.2UF_16V_10%_X5R, "Non-polarised capacitor", Case=0603, Manufacturer=GENERIC, Manufacturer1 ComponentHeight=0.9mm, Manufacturer1 Example=YAGEO, Manufacturer1 Part Number=CC0603KRX5R7BB225, Tolerance=±10%, Voltage=16V, Author="CERN DEM JLC", Component Type=Standard, CreateDate=28.04.2011, HelpURL=\\cern.ch\dfs\Applications\Altium\Datasheets\CC0805_X5R_PHYCOMP_HC.pdf, LatestRevisionDate=28.04.2011, Manufacturer Part Number=CC0603_2.2UF_16V_10%_X5R, Mounted=Yes, Part Description="SMD Multilayer Chip Ceramic Capacitor", Part Number=CC0603_2.2UF_16V_10%_X5R, Pin Count=2, Sense=No, SMD=Yes, Socket=No, Status=Preferred, TC=X5R
C112: library part CC0402_1UF_16V_10%_X5R, "Non-polarised capacitor", Case=0402, Manufacturer=GENERIC, Manufacturer1 ComponentHeight=0.55mm, Manufacturer1 Example=TDK, Manufacturer1 Part Number=C1005X5R1C105KT, Tolerance=±10%, Voltage=16V, Author="CERN DEM JLC", Component Type=Standard, CreateDate=25.10.2012, HelpURL=\\cern.ch\dfs\Applications\Altium\Datasheets\CC0402_X5R_TDK_C.pdf, LatestRevisionDate=25.10.2012, Manufacturer Part Number=CC0402_1UF_16V_10%_X5R, Mounted=Yes, Part Description="SMD Multilayer Chip Ceramic Capacitor", Part Number=CC0402_1UF_16V_10%_X5R, Pin Count=2, Sense=No, SMD=Yes, Socket=No, Status=Preferred, TC=X5R
C118: library part CTE3216-18_4.7UF_10V_10%_AVX_TPSA475K010T1400, "Polarised capacitor", Case=A, Manufacturer=AVX, Manufacturer Part Number=TPSA475K010T1400, Tolerance=±10%, Voltage=10V, Author="CERN DEM JLC", Component Type=Standard, ComponentHeight=1.8mm, CreateDate=23.01.2018, HelpURL=\\cern.ch\dfs\Applications\Altium\Datasheets\CTE-LESR_AVX_TPS-AUTO.pdf, LatestRevisionDate=23.01.2018, Mounted=Yes, Part Description="Low ESR 1R4 Automotive Solid Tantalum Chip Capacitor", Part Number=CTE3216-18_4.7UF_10V_10%_AVX_TPSA475K010T1400, Pin Count=2, Sense=No, SMD=Yes, Socket=No, Status=Preferred
C119 C120 C121: library part CC0402_100NF_25V_10%_X7R_YUDEN_TMK105B7104KVHF, "Non-polarised capacitor", Case=0402, Manufacturer="TAIYO YUDEN", Manufacturer Part Number=TMK105B7104KVHF, Tolerance=±10%, Voltage=25V, Author="CERN DEM JLC", Component Type=Standard, ComponentHeight=0.55mm, CreateDate=10-May-17, HelpURL=\\cern.ch\dfs\Applications\Altium\Datasheets\CC0402_TAIYO-YUDEN_TMK105B7104KVHF.pdf, LatestRevisionDate=10-May-17, Mounted=Yes, Part Description="SMD Multilayer Chip Ceramic Capacitor (High Dielectric Type) for Automotive / Industrial Applications", Part Number=CC0402_100NF_25V_10%_X7R_YUDEN_TMK105B7104KVHF, Pin Count=2, Sense=No, SMD=Yes, Socket=No, Status="Not Recommended", TC=X7R
CLIP1 CLIP2 CLIP3 CLIP4 CLIP5 CLIP6 CLIP7 CLIP8 CLIP9 CLIP10 CLIP11 CLIP12 CLIP13 CLIP14 CLIP15 CLIP16 CLIP17 CLIP18: library part SHIELD_CLIP, "Surface Mount Clip for PCB Screening Covers", Manufacturer=HARWIN, Author="CERN DEM JLC", ComponentHeight=3.5mm, Component Type=Standard, CreateDate=2013-06-25, HelpURL=\\cern.ch\dfs\Applications\Altium\Datasheets\CLIP_HOLLAND-SHIELDING_LC.pdf, LatestRevisionDate=2013-06-25, Manufacturer Part Number=S1411-46R, Mounted=Yes, PackageDescription="Surface Mount Clip for PCB Screening Covers, 1500 Serie", Part Description="Surface Mount Clip for PCB Screening Covers, 1500 Serie", Part Number=S1411-46R, Pin Count=1, PressFit=No, SMD=Yes, Socket=No, Status=None, Table="Metal Screening Box"
D1A D1B D1C D1D D1E D1F D1G D1H D2A D2B D2C D2D D2E D2F D2G D2H: "Serial Diode", Case=SOT23-3, Manufacturer="NXP SEMICONDUCTORS", Power=250mW, Voltage=75V, Author="CERN DEM JMW", Bonding=No, ComponentHeight=1.1mm, Component Type=Standard, CreateDate=2008-11-21, Device=BAV199, HelpURL=\\cern.ch\dfs\Applications\Altium\Datasheets\BAV199.pdf, LatestRevisionDate=2008-11-21, Manufacturer Part Number=BAV199, Mounted=Yes, PackageDescription="SOT23 3-Leads, Pitch 0.95mm - Body 1.4x3mm, IPC Medium Density", Part Description="Low-Leakage Double Diode", Part Number=BAV199, Pin Count=3, PressFit=No, Sense=No, SMD=Yes, Socket=No
D3 D4: "Ultra Low Capacitance Double Rail-to-Rail ESD Protection Diode", Case=SOT143B, Manufacturer="NXP SEMICONDUCTORS", Voltage=5.5V, Author="CERN DEM JLC", Bonding=No, Component Type=Standard, ComponentHeight=1.1mm, CreateDate=22.03.2011, Device=PRTR5V0U2X, HelpURL=\\cern.ch\dfs\Applications\Altium\Datasheets\PRTR5V0U2X.pdf, LatestRevisionDate=22.03.2011, Manufacturer Part Number=PRTR5V0U2X, Mounted=Yes, PackageDescription="SOT143B, SOT, 1.90mm Pitch; 4 Pin, 1.30mm W X 2.90mm L X 1.10mm H body, IPC Medium Density", Part Description="Ultra Low Capacitance (1pF) Double Rail-to-Rail ESD Protection Diode (8kV)", Part Number=PRTR5V0U2X, Pin Count=4, PressFit=No, Sense=No, SMD=Yes, Socket=No
D5 D6 D16: "Zener Diode", Case=DO-214AA, Manufacturer="FAIRCHILD SEMICONDUCTOR", Power=600W, Voltage=12V, Author="CERN DEM JLC", Bonding=No, ComponentHeight=2.65mm, Component Type=Standard, CreateDate=10.04.2013, Device=SMBJ12A, HelpURL=\\cern.ch\dfs\Applications\Altium\Datasheets\SMBJ.pdf, LatestRevisionDate=10.04.2013, Manufacturer Part Number=SMBJ12A, Mounted=Yes, PackageDescription="DO-214-AA/SMB Diode, Molded Body; 5.34mm L X 3.625mm W X 2.65mm H, IPC Medium Density", Part Description="Uni-Directional Transient Voltage Suppressor Diode", Part Number=SMBJ12A, Pin Count=2, PressFit=No, Sense=No, SMD=Yes, Socket=No
D7 D8 D9 D10: "Diode", Case=SOD-323F, Manufacturer="FAIRCHILD SEMICONDUCTOR", Power=150mA, Voltage=75V, Author="CERN DEM JLC", Bonding=No, ComponentHeight=1mm, Component Type=Standard, CreateDate=12.05.2011, Device=1N4148WS, HelpURL=\\cern.ch\dfs\Applications\Altium\Datasheets\1N4148WS.pdf, LatestRevisionDate=12.05.2011, Manufacturer Part Number=1N4148WS, Mounted=Yes, PackageDescription="SODFL Diode; 1.70mm W X 1.25mm L X 1.00mm H body, IPC Medium Density", Part Description="Small Signal Diodes", Part Number=1N4148WS, Pin Count=2, PressFit=No, Sense=No, SMD=Yes, Socket=No
D11 D12 D13 D18: "Fivefold ESD Protection Diode Arrays", Case=SOT363, Manufacturer=NEXPERIA, Power=200W, Voltage=3.3V, Author="CERN DEM WB", Bonding=No, Component Type=Standard, ComponentHeight=1.1mm, CreateDate=05.07.2021, Device=PESD3V3L5UY, HelpURL=\\cern.ch\dfs\Applications\Altium\Datasheets\PESD3V3L5UY.pdf, LatestRevisionDate=05.07.2021, Manufacturer Part Number=PESD3V3L5UY, Mounted=Yes, PackageDescription="SOT363, SC-88, 0.65mm Pitch; 6 Pin, 1.25mm W X 2.00mm L X 1.10mm H body, IPC Medium Density", Part Description="Fivefold ESD Protection Diode Arrays (30kV)", Part Number=PESD3V3L5UY, Pin Count=6, PressFit=No, Sense=No, SMD=Yes, Socket=No
D14 D15: "Schottky Diode", Case=SOD-523F, Manufacturer=COMCHIP, Power=500mA, Voltage=20V, Author="CERN DEM HF", Bonding=No, Component Type=Standard, ComponentHeight=1mm, CreateDate=13.10.2023, Device=CDBU0520-HF, HelpURL=\\cern.ch\dfs\Applications\Altium\Datasheets\CDBU0520-HF.pdf, LatestRevisionDate=13.10.2023, Manufacturer Part Number=CDBU0520-HF, Mounted=Yes, PackageDescription="Small Outline Diode Flat Lead (SOD-523F), Body; 1.80mm L X 1mm W X 0.85mm H", Part Description="20V Surface mount Schottky Barrier Diode", Part Number=CDBU0520-HF, Pin Count=2, PressFit=No, Sense=No, SMD=Yes, Socket=No
D17: "Schottky Diode", Case=SOD323, Manufacturer=INFINEON, Power=750mA, Voltage=40V, Author="CERN DEM JLC", Bonding=No, Component Type=Standard, ComponentHeight=1.1mm, CreateDate=12.11.2014, Device=BAT165, HelpURL=\\cern.ch\dfs\Applications\Altium\Datasheets\BAT165.pdf, LatestRevisionDate=12.11.2014, Manufacturer Part Number=BAT165, Mounted=Yes, PackageDescription="Small Outline Diode (SOD-323), 1.70mm W X 1.25mm L X 1.10mm H body,  IPC Medium Density", Part Description="Medium Power AF Schottky Diode", Part Number=BAT165, Pin Count=2, PressFit=No, Sense=No, SMD=Yes, Socket=No
FL1: library part FIL_MURATA_BNX022-01L, "Block Type EMIFIL (LC Combined)", Manufacturer=MURATA, Manufacturer Part Number=BNX022-01L, Resistance=0.5R, Author="CERN DEM JLC", Component Type=Standard, ComponentHeight=3.3mm, CreateDate=10.10.2012, HelpURL=\\cern.ch\dfs\Applications\Altium\Datasheets\FIL_MURATA_BNX022-01L.pdf, LatestRevisionDate=10.10.2012, Mounted=Yes, Part Description="Block Type EMIFIL (LC Combined) SMD Type, BNX02* Series", Part Number=FIL_MURATA_BNX022-01L, Pin Count=2, Sense=No, SMD=Yes, Socket=No, Status=None
FTG1: library part FIDUCIAL_TARGET_C100-200, "Fiducial Target", Author="CERN DEM JLC", Component Type="Standard (No BOM)", ComponentHeight=0mm, CreateDate=09.02.2010, Family=Fiducial, HelpURL=Undefined, LatestRevisionDate=04.04.2012, Mounted=No, PackageDescription="Round Fiducial Target, Top Layer, 1.0mm, Top Solder 2.0mm, Keepout =2.0mm", Part Description="Round Fiducial Target, Top Layer, 1.0mm, Top Solder 2.0mm, Keepout =2.0mm", Part Number=FIDUCIAL_TARGET_C100-200, Pin Count=1, Sense=No, SMD=Yes, Socket=No, Status=None
FTG2 FTG3 FTG4: library part FIDUCIAL_TARGET_S100-200, "Fiducial Target", Author="CERN DEM JLC", Component Type="Standard (No BOM)", ComponentHeight=0mm, CreateDate=09.02.2010, Family=Fiducial, HelpURL=Undefined, LatestRevisionDate=04.04.2012, Mounted=No, PackageDescription="Square Fiducial Target, Top Layer, 1.0mm, Top Solder 2.0mm, Keepout =2.0mm", Part Description="Square Fiducial Target, Top Layer, 1.0mm, Top Solder 2.0mm, Keepout =2.0mm", Part Number=FIDUCIAL_TARGET_S100-200, Pin Count=1, Sense=No, SMD=Yes, Socket=No, Status=None
IC1A IC1B IC1C IC1D IC1E IC1F IC1G IC1H IC35: library part OA_OPA2197IDGKR, "36-V, Precision, Rail-to-Rail Input Output, Low Offset Voltage Op Amp 8-VSSOP", Case=MSOP8, Manufacturer="TEXAS INSTRUMENTS", Author=GK, Bonding=No, ComponentHeight=1.1mm, Component Type=Standard, CreateDate=20.04.2017, Device=OPA2197IDGKR, HelpURL=\\cern.ch\dfs\Applications\Altium\Datasheets\OPA2140AIDGK.pdf, LatestRevisionDate=20.04.2017, Manufacturer Part Number=OPA2197IDGKR, Mounted=Yes, PackageDescription="SOP, 0.65mm pitch; 8 pin, 3.00mm W X 3.00mm L X 1.10mm H body, IPC Medium Density", Part Description="High-Precision, Low-Noise, Rail-to-Rail Output,10-MHz Op Amp", Part Number=OPA2197IDGKR, Pin Count=8, PressFit=No, Sense=No, SMD=Yes, Socket=No
IC2A IC2B IC2C IC2D IC2E IC2F IC2G IC2H: "10MHz, 20V/us, G= 1, 10, 100, 1000 iCMOS Programmable Gain Instrumentation Amplifier", Case=MSOP10, Manufacturer="ANALOG DEVICES", Author="CERN DEM JLC", Bonding=No, ComponentHeight=1.1mm, Component Type=Standard, CreateDate=2013-10-02, Device=AD8253ARMZ, HelpURL=\\cern.ch\dfs\Applications\Altium\Datasheets\AD8253ARMZ.pdf, LatestRevisionDate=2013-10-02, Manufacturer Part Number=AD8253ARMZ, Mounted=Yes, PackageDescription="MSOP, 10-Leads, Body 3.1x3.1mm (max), Pitch 0.50mm, IPC Medium Density", Part Description="10MHz, 20V/us, G= 1, 10, 100, 1000 iCMOS Programmable Gain Instrumentation Amplifier", Part Number=AD8253ARMZ, Pin Count=8, PressFit=No, Sense=No, SMD=Yes, Socket=No
IC3: "Remote 8-bit I/O Expander For I2C Bus", Case=SOIC16W, Manufacturer="TEXAS INSTRUMENTS", Author="CERN DEM JLC", Bonding=No, ComponentHeight=2.65mm, Component Type=Standard, CreateDate=01.11.2012, Device=PCF8574ADW, HelpURL=\\cern.ch\dfs\Applications\Altium\Datasheets\PCF8574ADW.pdf, LatestRevisionDate=01.11.2012, Manufacturer Part Number=PCF8574ADW, Mounted=Yes, PackageDescription="SOIC 16, Pitch 1.27mm - Body 7.5x10.3mm, IPC Medium Density", Part Description="Remote 8-bit I/O Expander For I2C Bus", Part Number=PCF8574ADW, Pin Count=16, PressFit=No, Sense=No, SMD=Yes, Socket=No
IC4 IC5 IC13 IC14 IC15 IC16 IC17: "LVDS Single Port High Speed Repeater", Case=TSSOP8, Manufacturer="FAIRCHILD SEMICONDUCTOR", Author="CERN DEM JLC", Bonding=No, ComponentHeight=0.8mm, Component Type=Standard, CreateDate=08.11.2016, Device=FIN1101K8X, HelpURL=\\cern.ch\dfs\Applications\Altium\Datasheets\FIN1101K8X.pdf, LatestRevisionDate=08.11.2016, Manufacturer Part Number=FIN1101K8X, Mounted=Yes, PackageDescription="SOP, 0.50mm Pitch; 8 pin, 2.30mm W X 2.00mm L X 0.90mm H body, PC Medium Density", Part Description="LVDS Single Port High Speed Repeater", Part Number=FIN1101K8X, Pin Count=8, PressFit=No, Sense=No, SMD=Yes, Socket=No
IC6 IC7 IC8 IC9 IC11: "High-Speed Differential Line Receiver", Case=SOT23-5, Manufacturer="TEXAS INSTRUMENTS", Author="CERN DEM JLC", Bonding=No, ComponentHeight=1.45mm, Component Type=Standard, CreateDate=03.03.2011, Device=SN65LVDS2DBVR, HelpURL=\\cern.ch\dfs\Applications\Altium\Datasheets\SN65LVDS2DBVR.pdf, LatestRevisionDate=22.09.2011, Manufacturer Part Number=SN65LVDS2DBVR, Mounted=Yes, PackageDescription="SOT, 0.95mm pitch; 5 pin, 1.60mm W X 2.90mm L X 1.45mm H body, IPC Medium Density", Part Description="High-Speed Differential Line Receiver", Part Number=SN65LVDS2DBVR, Pin Count=5, PressFit=No, Sense=No, SMD=Yes, Socket=No
IC10: "High-Speed Differential Line Driver", Case=SOT23-5, Manufacturer="TEXAS INSTRUMENTS", Author="CERN DEM JLC", Bonding=No, ComponentHeight=1.45mm, Component Type=Standard, CreateDate=22.09.2011, Device=SN65LVDS1DBVT, HelpURL=\\cern.ch\dfs\Applications\Altium\Datasheets\SN65LVDS1DBVT.pdf, LatestRevisionDate=22.09.2011, Manufacturer Part Number=SN65LVDS1DBVT, Mounted=Yes, PackageDescription="SOT, 0.95mm pitch; 5 pin, 1.60mm W X 2.90mm L X 1.45mm H body, IPC Medium Density", Part Description="High-Speed Differential Line Driver", Part Number=SN65LVDS1DBVT, Pin Count=5, PressFit=No, Sense=No, SMD=Yes, Socket=No
IC12 IC18: "1.7V-5.5V, 2K I2C Serial EEPROM With EUI-48 Node Identity", Case=SOT23-5, Manufacturer="MICROCHIP TECHNOLOGY", Author="CERN DEM MR", Bonding=No, ComponentHeight=1.45mm, Component Type=Standard, CreateDate=31.03.2016, Device=24AA02E48T-I/OT, HelpURL=\\cern.ch\dfs\Applications\Altium\Datasheets\24AA02E48T-I-OT.pdf, LatestRevisionDate=31.03.2016, Manufacturer Part Number=24AA02E48T-I/OT, Mounted=Yes, PackageDescription="SOT, 0.95mm pitch; 5 pin, 1.60mm W X 2.90mm L X 1.45mm H body, IPC Medium Density", Part Description="1.7V-5.5V, 2K I2C Serial EEPROM With EUI-48 Node Identity", Part Number=24AA02E48T-I/OT, Pin Count=5, PressFit=No, Sense=No, SMD=Yes, Socket=No
IC19 IC20: "8-Bit Shift Register With 3-State Output Register", Case=TSSOP16, Manufacturer="TEXAS INSTRUMENTS", Author="CERN DEM JLC", Bonding=No, ComponentHeight=1.2mm, Component Type=Standard, CreateDate=10.05.2012, Device=SN74LV595APWT, HelpURL=\\cern.ch\dfs\Applications\Altium\Datasheets\SN74LV595APWT.pdf, LatestRevisionDate=10.05.2012, Manufacturer Part Number=SN74LV595APWT, Mounted=Yes, PackageDescription="SOP, 0.65mm pitch; 16 pin, 4.40mm W X 5.00mm L X 1.20mm H body IPC Medium Density", Part Description="8-Bit Shift Register With 3-State Output Register", Part Number=SN74LV595APWT, Pin Count=16, PressFit=No, Sense=No, SMD=Yes, Socket=No
IC21 IC32: "1.22V to 20V 500mA, Low Noise, LDO Adjustable Micropower Regulator", Case=SOIC8, Manufacturer="LINEAR TECHNOLOGY", Author="CERN DEM JLC", Bonding=No, ComponentHeight=1.75mm, Component Type=Standard, CreateDate=11.01.2010, Device=LT1763CS8#PBF, HelpURL=\\cern.ch\dfs\Applications\Altium\Datasheets\LT1763CS8#PBF.pdf, LatestRevisionDate=11.01.2010, Manufacturer Part Number=LT1763CS8#PBF, Mounted=Yes, PackageDescription="SOIC 8, Pitch 1.27mm, Body 4x5mm, IPC Medium Density", Part Description="1.22V to 20V 500mA, Low Noise, LDO Adjustable Micropower Regulator", Part Number=LT1763CS8#PBF, Pin Count=8, PressFit=No, Sense=No, SMD=Yes, Socket=No
IC22 IC29: "100mA, Low Noise, LDO Micropower Adjustable Regulator in SOT-23", Case=SOT23-5, Manufacturer="LINEAR TECHNOLOGY", Author="CERN DEM JLC", Bonding=No, Component Type=Standard, ComponentHeight=1mm, CreateDate=26.08.2013, Device=LT1761ES5-SD#TRMPBF, HelpURL=\\cern.ch\dfs\Applications\Altium\Datasheets\LT1761ES5-SD#TRMPBF.pdf, LatestRevisionDate=26.08.2013, Manufacturer Part Number=LT1761ES5-SD#TRMPBF, Mounted=Yes, PackageDescription="SOT23, 0.95mm Pitch; 5 Pin, 1.60mm W X 2.90mm L X 1.00mm H body, IPC Medium Density", Part Description="1.22V to 20V, 100mA, Low Noise, LDO Adjustable Micropower Regulator", Part Number=LT1761ES5-SD#TRMPBF, Pin Count=5, PressFit=No, Sense=No, SMD=Yes, Socket=No
IC23 IC30: "100mA, Low Noise, LDO Micropower Adjustable Regulator in SOT-23", Case=SOT23, Manufacturer="LINEAR TECHNOLOGY", Author="CERN DEM MR", Bonding=No, ComponentHeight=1mm, Component Type=Standard, CreateDate=17.02.2016, Device=LT1761ES5-BYP#TRMPBF, HelpURL=\\cern.ch\dfs\Applications\Altium\Datasheets\LT1761ES5-SD#TRMPBF.pdf, LatestRevisionDate=17.02.2016, Manufacturer Part Number=LT1761ES5-BYP#TRMPBF, Mounted=Yes, PackageDescription="SOT23, 0.95mm pitch; 5 pin, 1.6mm W X 2.9mm L, IPC Medium Density", Part Description="1.22V to 20V, 100mA, Low Noise, LDO Adjustable Micropower Regulator", Part Number=LT1761ES5-BYP#TRMPBF, Pin Count=5, PressFit=No, Sense=No, SMD=Yes, Socket=No
IC24: library part CMP-0476-00219-1, "200 mA, Low Noise, Low Dropout Negative Micropower Regulator, -1.9 to -20 V Vin, Adjustable Vout, 8-pin SON (DD-8), -40 to 125 degC, Pb-Free", Dropout Voltage(V)=0.34, Manufacturer="Linear Technology", Output Voltage=Adj, Shutdown Current(uA)=3, Code_JEDEC=MO-229, ComponentLink1Description="Manufacturer URL", ComponentLink1URL=http://www.linear.com/, ComponentLink2Description=Datasheet, ComponentLink2URL=http://cds.linear.com/docs/en/datasheet/1964fb.pdf, ComponentLink3Description="Package Specification", ComponentLink3URL=http://cds.linear.com/docs/en/packaging/DFN_8_05-08-1698.pdf, DatasheetVersion="Rev. B", Discrete Pass Element=no, Iout(mA)=200, Isupply(mA)=0.03, Mounting Technology="Surface Mount", Noise(uV)=30, Number of Outputs=1, PackageDescription="8-Pin Plastic DFN, Body 3 x 3 mm, Pitch 0.5 mm", PackageReference=DD-8, PackageVersion=Jun-10, PartNumber=LT1964EDD#PBF, PSRR(dB)=54, RoHS=TRUE, Vin Max(V)=-1.9, Vin Min(V)=-20, Vout Max(V)=-1.22, Vout Min(V)=-20